# Altium PCB main_pcb_new_id.PcbDoc (part 2 of 2)
Units mil, origin at the board's own origin, x right, y up, seen from the top; angles counter-clockwise.
Board outline 3546.59 x 5237.31 mil, 2 copper layers (Top Layer, Bottom Layer); 111 components, 96 nets, 453 pads, 145 vias.
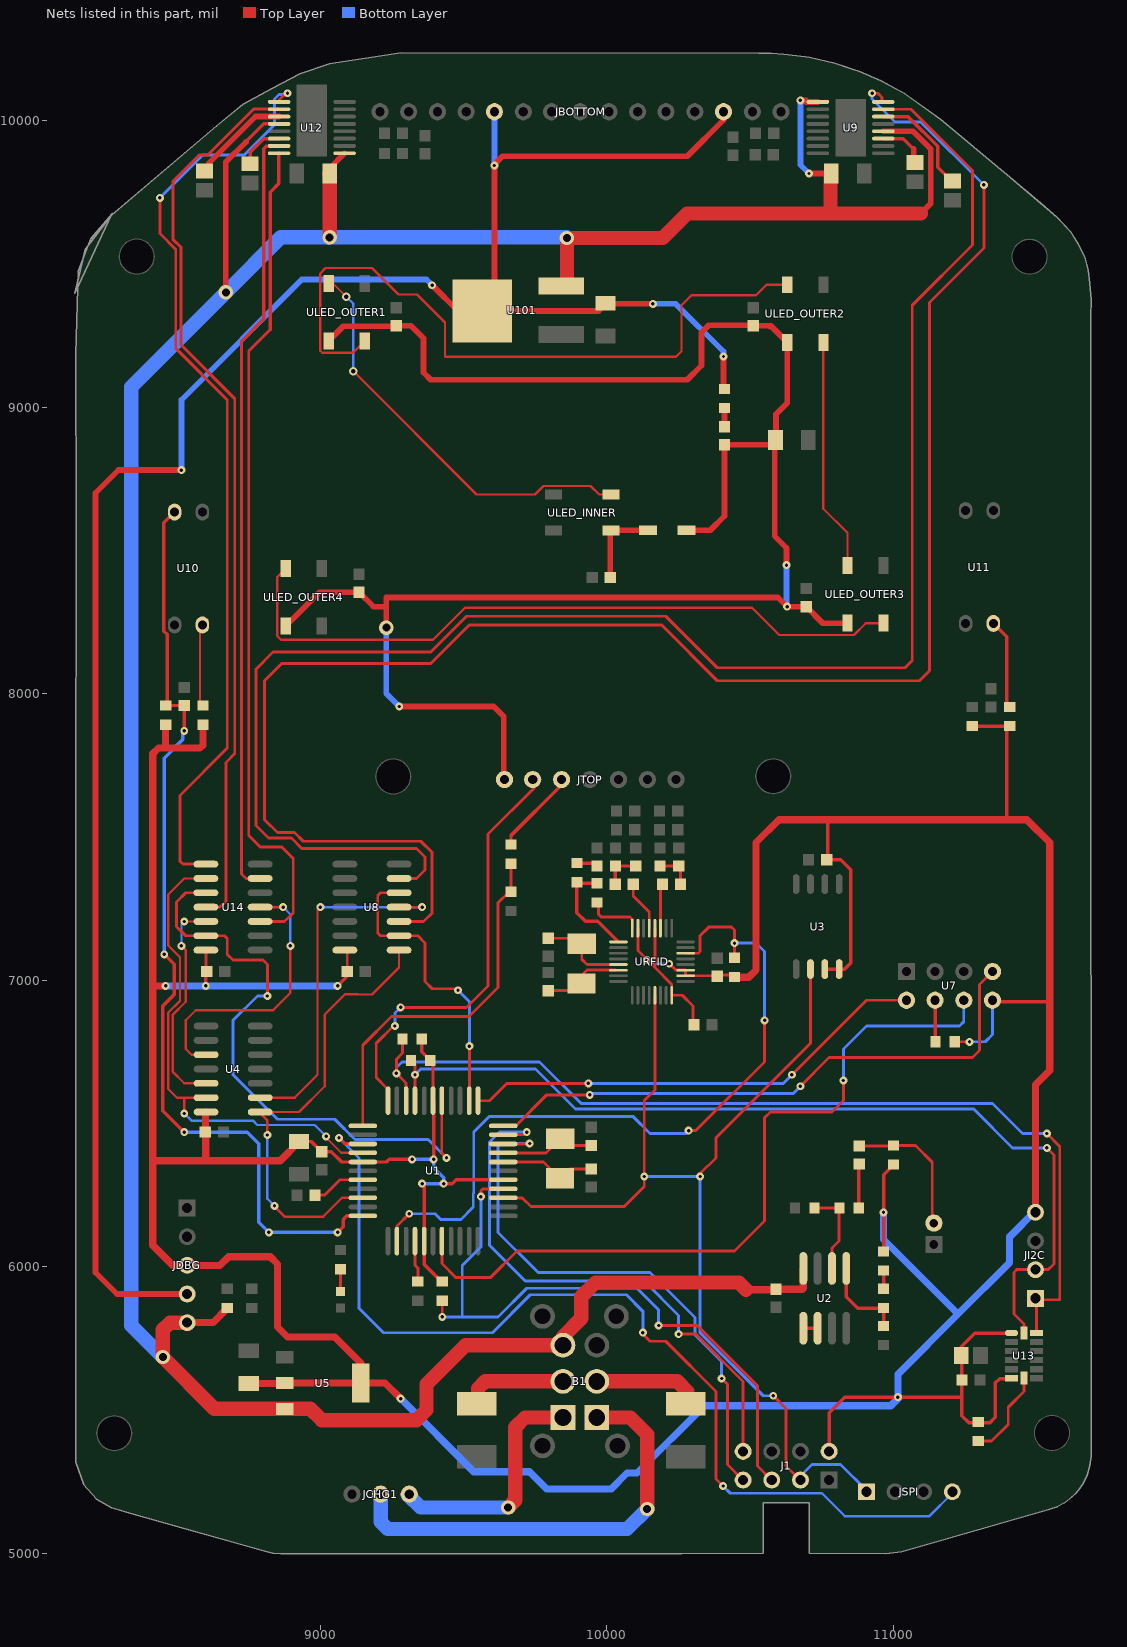
[diagram p2: the nets of this part, all layers, seen from the top]

## Via types
v1: diameter 27.56, hole 11.81, Top Layer to Bottom Layer, 105 vias
v2: diameter 50, hole 28, Top Layer to Bottom Layer, 23 vias
v3: diameter 25.98, hole 12.99, Top Layer to Bottom Layer, tented top, 7 vias
v4: diameter 30, hole 15, Top Layer to Bottom Layer, 4 vias
v5: diameter 20, hole 10, Top Layer to Bottom Layer, 3 vias
v6: diameter 27.6, hole 11.81, Top Layer to Bottom Layer, 2 vias
v7: diameter 25.98, hole 12.99, Top Layer to Bottom Layer, 1 vias

## Nets (pads, with @x,y where several pads share a name; then routed paths per layer and width w, separated by ;. In a path a pad name is that pad's centre, name@x,y a point inside that pad or via, vN(x,y) a via of type N, cw(c..) or ccw(c..) an arc to the next point about the centre after c; other vN are vias at no path point) (continued)
MTR_R_DIR: U1.31 U4.1 U8.1 | length 1603.4
  Top Layer w8: U4.1@8785,6540 8815,6510 v1(8815,6460) ; U4.1@8790,6540 8925,6540 9015,6630 9015,6880 9085.78,6950.78 9130.68,6950.78 9131.46,6950 9180,6950 9274.49,7044.49 U8.1@9274.49,7105 ; v1(8840,6212.5) 8840,6210 8875,6175 9010,6175 9075.55,6240.55 U1.31@9147.95,6240.55
  Bottom Layer w8: v1(8815,6460) 8815,6237.5 v1(8840,6212.5)
MTR_R_EN: U1.13 U8.2 U8.5 | length 1053
  Top Layer w10: U8.5@9274.49,7305 9210,7305 9200,7295 9200,7165 9210,7155 U8.2@9274.49,7155 9340,7155 9365,7130 9365,6995 9390,6970 9475,6970 v1(9480,6965) ; U1.13@9518.95,6579.55 9520,6580.6 v1(9520,6770)
  Bottom Layer w10: v1(9480,6965) 9520,6925 v1(9520,6770)
MTR_R_ENC: C46.2 R20.1 U1.33 U10.3 | length 3299.6
  Top Layer w12: v1(8455,7090) 8490,7055 8490,6950 8450,6910 8450,6545 v1(8525,6470) ; U10.3@8491.12,8633.47 8453.5,8595.84 8453.5,8218.28 8465,8206.78 8465,7963.46 8470,7958.46 8470.04,7958.5 C46.2@8525,7958.5 v1(8525,7870) ; v6(9060,6120) 9080,6140 9080,6165 9092.55,6177.55 U1.33@9147.95,6177.55
  Bottom Layer w12: v1(8455,7090) 8455,7775 8520,7840 8520,7865 v1(8525,7870) ; v1(8525,6470) 8745,6470 8785,6430 8785,6155 v1(8820,6120) v6(9060,6120)
NetB1_1: B1.1 JCHG1.3 | length 839.4
  Top Layer w50: v2(9655,5160) 9680,5185 9680,5440 9714.26,5474.26 B1.1@9846.2,5474.26
  Bottom Layer w50: JCHG1.3@9305,5205 9350,5160 v2(9655,5160)
NetB1_2: B1.2 F1.2 | length 366.7
  Top Layer w50: F1.2@9550,5515 9550,5575 9575.24,5600.24 B1.2@9846.2,5600.24
NetB1_5: B1.5 F2.2 | length 374.7
  Top Layer w50: B1.5@9960,5600 9960.24,5600.24 B1.5@9964.31,5600.24 10244.76,5600.24 10280,5565 F2.2@10280,5525
NetB1_6: B1.6 JCHG1.2 | length 1524.6
  Top Layer w50: B1.6@9964.31,5474.26 10080.74,5474.26 10140,5415 v2(10140,5155)
  Bottom Layer w50: JCHG1.2@9210,5205 9210,5110 9235,5085 10070,5085 v2(10140,5155)
NetC2_2: C2.2 U1.7 XTAL1.2 | length 344.4
  Top Layer w10: U1.7@9637.95,6365.55 9778.94,6365.55 XTAL1.2@9836.06,6308.43 9869.13,6341.5 C2.2@9945,6341.5
NetC3_1: C3.1 R11.1 | length 155.6
  Top Layer w12: R11.1@10878.46,6205 10878.46,6358.46 C3.1@10880,6360
NetC3_2: C3.2 MK1.1 R10.2 | length 501.9
  Top Layer w10: C3.2@10880,6421.5 10998.5,6421.5 R10.2@11000,6420 ; R10.2@11000,6423.46 11076.54,6423.46 11135,6365 11135,6150 MK1.1@11140,6145
NetC4_2: C4.2 U1.8 XTAL1.1 | length 337.4
  Top Layer w10: U1.8@9637.95,6397.55 9787.39,6397.55 XTAL1.1@9837.05,6447.2 9860.75,6423.5 C4.2@9945,6423.5
NetC7_1: C7.1 U1.29 | length 195.1
  Top Layer w10: C7.1@8975,6250 C7.1@8981.5,6250 9015,6250 9068.55,6303.55 U1.29@9147.95,6303.55
NetC9_1: C9.1 URFID.22 XRFID.2 | length 280.8
  Top Layer w10: C9.1@9795,6963.5 9886.14,6963.5 XRFID.2@9911.06,6988.43 9911.06,7016.06 9930,7035 URFID.22@10030,7035
NetC10_1: C10.1 URFID.21 XRFID.1 | length 301.2
  Top Layer w10: C10.1@9795,7146.5 9885.55,7146.5 9912.05,7120 9912.05,7072.95 9930.31,7054.69 10029.69,7054.69 URFID.21@10030,7055 ; URFID.21@10034.69,7054.69 URFID.21@10035,7055
NetC12_1: C12.1 D1.1 ULED_INNER.1 | length 284.4
  Top Layer w20: C12.1@10011.5,8415 10011.5,8566.26 ULED_INNER.1@10014.17,8568.94 10015.24,8570 D1.1@10143.07,8570
NetC21_1: C21.1 R16.1 | length 74.1
  Top Layer w12: R16.1@9895,7408.46 9955.04,7408.46 C21.1@9965,7398.5
NetC22_1: C22.1 C24.2 L2.2 | length 131.2
  Top Layer w12: C24.2@10185,7398.5 C22.1@10250,7398.5 10256.5,7392.01 L2.2@10256.5,7335
NetC25_2: C25.2 U9.11 | length 170.1
  Top Layer w12: U9.11@10964.17,9936.61 11033.39,9936.61 11070,9900
  Top Layer w20: C25.2@11060,9855 11070,9865 11070,9900
NetC30_2: C30.2 U9.14 | length 386.9
  Top Layer w12: U9.14@10964.17,10013.39 11051.61,10013.39 11055,10010 ; 11053.94,10010 11154,9909.94 11154,9836 C30.2@11210,9780
NetC33_2: C33.2 U12.11 | length 338.5
  Top Layer w20: C33.2@8610,9825 8610,9828.46 8610,9850 8773.39,10013.39 U12.11@8855.83,10013.39
NetC39_2: C39.2 U12.14 | length 161.7
  Top Layer w12: C39.2@8755,9848.46 8755,9860 8755,9890 8801.61,9936.61 U12.14@8855.83,9936.61
NetC42_1: C42.1 C45.1 L3.2 | length 134.1
  Top Layer w12: L3.2@10028.5,7335 10028.5,7397.01 C45.1@10030,7398.5 C42.1@10100,7398.5
NetDLED_2: DLED.2 R27.1 | length 82.5
  Top Layer w10: R27.1@9065,5995 9070,5990 DLED.2@9070,5914.53
NetJTOP_5: JTOP.5 R4.2 | length 302.5
  Top Layer w12: R4.2@9665,7475 9665,7505 9840,7680 JTOP.5@9840,7705
NetL1_1: L1.1 R28.1 | length 65
  Top Layer w20: L1.1@10410,8931.5 R28.1@10410,8996.54
NetL2_1: L2.1 URFID.11 | length 158.7
  Top Layer w10: L2.1@10185,7330 10186.65,7328.35 L2.1@10186.65,7328.15 ; URFID.11@10186.65,7181.65 L2.1@10186.65,7328.15 ; L2.1@10193.5,7335 L2.1@10186.65,7328.15
NetL3_1: L3.1 URFID.13 | length 176.5
  Top Layer w10: L3.1@10091.5,7335 10091.5,7293.5 10147.28,7237.72 URFID.13@10147.28,7181.65
NetR1_1: R1.1 U1.37 | length 148.7
  Top Layer w10: U1.37@9329.95,6089.55 9329.95,6005.05 9340,5995 R1.1@9340,5948.46 R1.1@9340,5945
NetR8_1: R8.1 R11.2 U2.6 | length 326.7
  Top Layer w10: R8.1@10723.46,6205 R11.2@10820,6205 ; U2.6@10785,5994.33 10785,6065 10810,6090 10810,6195 R11.2@10820,6205 ; R11.2@10820,6210 R11.2@10820,6205
NetR12_2: R12.2 R13.1 U2.5 | length 305.9
  Top Layer w12: U2.5@10835,5994.33 10835,5895 10875,5855 10965,5855 R12.2@10965,5795
NetR13_2: R13.2 R14.1 | length 63.1
  Top Layer w12: R13.2@10965,5923.46 R14.1@10965,5986.54
NetR15_1: R15.1 R16.2 URFID.17 | length 364.9
  Top Layer w12: R15.1@9965,7338.46 9898.07,7338.46 R16.2@9895,7341.54 9895,7235 9925,7205 9968.13,7205 10039.7,7133.43 URFID.17@10040,7133.43
NetR15_2: R15.2 URFID.16 | length 197.4
  Top Layer w10: R15.2@9970,7271.54 9970,7230 9980,7220 10080,7220 10088.23,7211.77 URFID.16@10088.23,7181.65
NetR18_2: R18.2 U7.CH_PD | length 145.6
  Top Layer w12: U7.CH_PD@11145,6930 11145,6786.54 R18.2@11146.54,6785
NetR19_1: R19.1 U10.1 | length 293.9
  Top Layer w8: R19.1@8580,7958.46 8580,8231.52 U10.1@8588.25,8239.77 U10.1@8585,8236.52 ; R19.1@8585,7958.46 R19.1@8588.25,7961.71
NetR22_2: R22.2 U13.7 | length 319.1
  Top Layer w10: R22.2@11295,5391.54 11341.54,5391.54 11400,5450 11400,5510 11455,5565 11455,5610 U13.7@11460,5615
NetR23_1: R23.1 U11.1 | length 310.7
  Top Layer w12: U11.1@11348.25,8244.77 11395,8198.01 R23.1@11395,7953.46
NetU2_1: U2.1 U2.2 | length 50
  Top Layer w12: U2.1@10685,5785.67 U2.2@10735,5785.67
NetU4_2: U4.2 U8.4 | length 1257.8
  Top Layer w8: U4.2@8790,6590 8910,6590 8990,6670 8990,7245 v1(9000,7255) ; U8.4@9274.49,7255 v1(9355,7255)
  Bottom Layer w8: v1(9000,7255) v1(9355,7255)
NetU4_10: U4.10 U14.4 | length 974.5
  Top Layer w8: U4.10@8601.02,6740 8550,6740 8530,6760 8530,6860 8565,6895 8835,6895 8895,6955 v1(8895,7120) ; U14.4@8789.49,7255 v1(8870,7255)
  Bottom Layer w8: v1(8870,7255) 8895,7230 v1(8895,7120)
NetU4_12: U4.12 U14.12 | length 755.9
  Top Layer w8: v1(8515,7120) 8530,7105 8530,6925 8485.22,6880.22 8485.22,6679.78 8525,6640 U4.12@8595,6640 ; v1(8525,7205) U14.12@8600.51,7205
  Bottom Layer w8: v1(8515,7120) 8515,7195 v1(8525,7205)
NetU8_3: U8.3 U9.16 | length 6322.9
  Top Layer w8: U8.3@9274.49,7205 U8.3@9279.49,7200
  Top Layer w10: U8.3@9274.49,7205 9360,7205 9390,7235 9390,7445 9350,7485 8940,7485 8910,7515 8850,7515 8805,7560 8805,8045 8865,8105 9385,8105 9520,8240 10190,8240 10385,8045 11090,8045 11125,8080 11125,9365 11315,9555 v1(11315,9775) ; v1(10925,10095) 10945,10095 10960,10080 U9.16@10960,10065
  Bottom Layer w10: v1(10925,10095) 10925,10075 11005,9995 11095,9995 v1(11315,9775)
NetU8_6: U8.6 U9.15 | length 5976.5
  Top Layer w10: U8.6@9274.49,7355 9335,7355 9365,7385 9365,7430 9335,7460 8935,7460 8899,7496 8819,7496 8775,7540 8775,8085 8835,8145 9385,8145 9510,8270 10205,8270 10385,8090 11040,8090 11065,8115 11065,9355 11275,9565 11275,9825 11061.02,10038.98 U9.15@10964.17,10038.98
NetU12_9: U12.9 U14.8 | length 3271.8
  Top Layer w10: v1(8440,9730) 8440,9605 8495,9550 8495,9205 8675,9025 8675,7810 8510,7645 8510,7415 8520,7405 U14.8@8600.51,7405 ; U12.9@8855.83,10064.57 8855.83,10070.83 v1@8880,10095 ; v1@8880,10090 v1(8885,10095)
  Bottom Layer w10: v1(8440,9730) 8590,9880 8735,9880 8840,9985 8840,10075 8855,10090 8880,10090 v1(8885,10095)
NetU12_10: U12.10 U14.11 | length 3166.9
  Top Layer w10: U14.11@8600.51,7255 8650,7255 8670,7275 8670,7760 8701,7791 8701,9029 8513,9217 8513,9557.46 8485,9585.46 8485,9786.97 8578.03,9880 8607.47,9880 8767.47,10040 U12.10@8855,10040
NetU12_15: U12.15 U14.6 | length 2680.2
  Top Layer w10: 8725,9230 8725,7370 8740,7355 U14.6@8789.49,7355
  Top Layer w12: 8725,9230 8802.46,9307.46 8802.46,9901.29 8811.17,9910 U12.15@8845,9910
NetU12_16: U12.16 U14.3 | length 2930.7
  Top Layer w10: U14.3@8789.49,7205 8875,7205 8905,7235 8905,7425 8865,7465 8790,7465 8750,7505 8750,9195 8825,9270
  Top Layer w12: 8825,9270 8825,9750 8855,9780 U12.16@8855,9884.61 ; U12.16@8855,9885 U12.16@8855,9884.61 ; U12.16@8855.83,9885.43 U12.16@8855,9884.61
NetULED_INNER_2: ULED_INNER.2 ULED_OUTER1.4 | length 1452.7
  Top Layer w8: ULED_OUTER1.4@9028.94,9431.61 9043.39,9431.61 v4(9090,9385) ; v4(9115,9125) 9545.08,8694.92 9749.17,8694.92 9778.89,8724.64 9942.87,8724.64 9972.59,8694.92 ULED_INNER.2@10014.17,8694.92
  Bottom Layer w8: v4(9090,9385) 9115,9360 v4(9115,9125)
NetULED_OUTER1_2: ULED_OUTER1.2 ULED_OUTER2.4 | length 2479.8
  Top Layer w8: ULED_OUTER1.2@9154.92,9230.83 9113.39,9189.3 9006.25,9189.3 8999.22,9196.33 8999.22,9466.11 9018.11,9485 9180,9485 9272.5,9392.5 9337.5,9392.5 9435,9295 9435,9175 10240,9175 10260,9195 10260,9355 10295,9390 10520,9390 10556.61,9426.61 ULED_OUTER2.4@10628.94,9426.61
NetULED_OUTER2_2: ULED_OUTER2.2 ULED_OUTER3.4 | length 814
  Top Layer w8: ULED_OUTER2.2@10754.92,9225.83 10754.92,8645.08 10838.94,8561.06 ULED_OUTER3.4@10838.94,8446.61
NetULED_OUTER3_2: ULED_OUTER3.2 ULED_OUTER4.4 | length 2472.1
  Top Layer w8: ULED_OUTER4.4@8878.94,8436.61 8849.22,8406.9 8849.22,8201.33 8862.55,8188 9393,8188 9505,8300 10505,8300 10600.7,8204.3 10861.62,8204.3 10903.15,8245.83 ULED_OUTER3.2@10964.92,8245.83
RESET: J1.5 R9.2 U1.4 | length 2269.3
  Top Layer w10: v1(9425,5825) R9.2@9425,5881.54 ; v1(9560,6245) 9560,6265 9566.55,6271.55 U1.4@9637.95,6271.55 ; v1(10180,5795) 10315,5795 10525,5585 10525,5305 J1.5@10575,5255
  Bottom Layer w10: v1(9425,5825) 9495,5825 ; v1(9560,6245) 9560,6070 9495,6005 9495,5825 ; v1(10180,5795) 10180,5850 10105,5925 9720,5925 9620,5825 9495,5825
RESET_RFID: R17.2 U1.35 URFID.6 | length 2630.1
  Top Layer w10: U1.35@9266.95,6089.55 9266.95,6141.95 v1(9310,6185) ; URFID.6@10274.25,7094.06 10319.06,7094.06 10325,7100 10325,7155 10355,7185 10435,7185 10445,7175 v1(10445,7129.23) R17.2@10445,7083.46 ; v1(10285,6475) 10310,6475 10550,6715 v1(10550,6860)
  Bottom Layer w10: v1(9310,6185) 9400,6185 9420,6165 9490,6165 9533.22,6208.22 9533.22,6256.09 9535,6257.87 9535,6470 9590,6525 10090,6525 10150,6465 10275,6465 v1(10285,6475) ; v1@10445,7130 10520,7130 10550,7100 v1(10550,6860)
RST_WIFI: U1.40 U7.RST | length 2686.1
  Top Layer w10: U1.40@9423.95,6089.55 9423.95,6011.05 9473,5962 9592.46,5962 9685.46,6055 10445,6055 10550,6160 10550,6520 10570,6540 10785,6540 10825,6580 v1(10825,6650) v1@10825,6655
  Bottom Layer w10: v1(10825,6650) 10825,6760 10905,6840 11230,6840 11245,6855 U7.RST@11245,6930
RXD_FTDI: J1.8 U1.10 | length 1960.3
  Top Layer w10: U1.10@9637.95,6460.55 9710.55,6460.55 v1(9720,6470) ; v1(10250,5765) 10310,5765 10475,5600 J1.8@10475,5350
  Bottom Layer w10: v1(9720,6470) 9625,6470 9590,6435 9590,6075 9715,5950 10130,5950 10250,5830 v1(10250,5765)
RXD_WIFI: U1.12 U7.TXD | length 1645.2
  Top Layer w10: U1.12@9549.95,6579.55 9589.55,6579.55 9650,6640 v1(9935,6640) ; v1(10645,6670) 10905,6930 U7.TXD@11045,6930 U7.TXD@11050,6930
  Bottom Layer w10: v1(9935,6640) 10615,6640 v1(10645,6670)
SCK: J1.3 JSPI.1 U1.3 U3.6 URFID.29 | length 3824.1
  Top Layer w10: U1.3@9637.95,6240.55 9704.45,6240.55 9735,6210 10060,6210 10130,6280 v1(10130,6315) 10130,6580 10166.97,6616.97 URFID.29@10166.97,6947.4 ; v1(10325,6315) 10325,6325 10380,6380 10380,6450 10710.04,6780.04 U3.6@10710.04,7038.85 ; v1(10580,5550) 10625,5505 10625,5305 J1.3@10675,5255
  Bottom Layer w10: v1(10130,6315) v1(10325,6315) 10325,5770 10545,5550 v1(10580,5550) ; J1.3@10675.85,5255.85 J1.3@10675,5255.85 10675,5270 10715,5310 10815,5310 10905,5220 JSPI.1@10905,5215
SCL: JI2C.2 R6.1 U1.19 U13.14 | length 3270.5
  Top Layer w10: R6.1@9316.54,6720 9316.54,6718.46 9329.95,6705.05 v1(9329.95,6670) U1.19@9329.95,6579.55 ; U13.14@11455,5765 U13.14@11455,5768.74 11455,5800 11420,5835 11420,5980 11430,5990 JI2C.2@11495,5990 11540,5990 11560,6010 11560,6390 v1(11535,6415)
  Bottom Layer w10: v1(9329.95,6670) 9349.95,6690 9750,6690 9890,6550 11280,6550 11415,6415 v1(11535,6415)
SDA: JI2C.1 R7.1 U1.20 U13.13 | length 3426.5
  Top Layer w10: 9286.54,6775 9286.54,6745.79 9265,6724.25 v1(9265,6675) 9298.95,6641.05 U1.20@9298.95,6579.55 ; U13.13@11498.31,5768.74 11498.31,5881.69 11495,5885 11580,5885 11580,6420 v1(11535,6465)
  Bottom Layer w10: v1@9270,6675 v1(9265,6675) 9265,6695 9285,6715 9765,6715 9910,6570 11345,6570 11450,6465 v1(11535,6465)
SPI_CS: JSPI.4 U1.25 | length 3458.1
  Top Layer w10: v1(9065,6450) 9085,6430 U1.25@9140,6430 ; v1(10125,5770) 10120,5770 10150,5740 10205,5740 10380,5565 10380,5260 v1(10405,5235)
  Bottom Layer w8: 10430,5210 10750,5210 10830,5130 11125,5130 JSPI.4@11205,5210
  Bottom Layer w10: v1(9065,6450) 9135,6380 9135,5855 9220,5770 9600,5770 9732.5,5902.5 10067.5,5902.5 10125,5845 v1(10125,5770) ; v1(10405,5235) 10430,5210 ; JSPI.4@11205,5210 JSPI.4@11205,5215
SPK_DIR: U1.26 U4.13 U14.9 | length 1749
  Top Layer w8: v1(8525,6535) 8525,6590 ; U14.9@8600.51,7355 8525,7355 8469.22,7299.22 8469.22,7120.78 8510,7080 8510,6927.63 8469.22,6886.85 8469.22,6620.78 8500,6590 8525,6590 ; U4.13@8601.02,6590 8525,6590 ; v1(9020,6455) 9020,6450 9072.45,6397.55 U1.26@9147.95,6397.55
  Bottom Layer w8: v1(8525,6535) 8550,6510 8765,6510 8780,6495 8980,6495 v1(9020,6455)
SPK_EN: U1.16 U14.10 U14.13 | length 2132.6
  Top Layer w10: U14.10@8600.51,7305 8530,7305 8498.22,7273.22 8498.22,7186.78 8530,7155 U14.13@8600.51,7155 8665,7155 8675,7145 8675,7090 8695,7070 8800,7070 8815,7055 v1(8815,6945) ; U1.16@9423.95,6579.55 9423.22,6578.82 9423.22,6396.78 v1(9440,6380)
  Bottom Layer w10: v1(8815,6945) 8780,6945 8695,6860 8695,6670 8850,6515 9050,6515 9121,6444 9376,6444 v1(9440,6380)
TXD_FTDI: J1.7 U1.9 | length 1961.5
  Top Layer w10: U1.9@9637.95,6428.55 9728.55,6428.55 v1(9730,6430) ; v1(10400,5610) 10420,5590 10420,5310 J1.7@10475,5255
  Bottom Layer w10: v1@9725,6425 v1(9730,6430) 9630,6430 9620,6420 9620,6120 9760,5980 10150,5980 10307,5823 10307,5762.54 10400,5669.54 v1(10400,5610)
TXD_WIFI: U1.11 U7.RXD | length 2062.7
  Top Layer w10: U1.11@9637.95,6491.55 9681.55,6491.55 9790,6600 v1(9940,6600) ; v1(10675,6630) 10775,6730 11275,6730 11300,6755 11300,6985 11340,7025 U7.RXD@11345,7025
  Bottom Layer w10: v1(9940,6600) 9945,6605 10650,6605 v1(10675,6630)
ULTRA_ECHO: R4.1 R5.1 U1.23 | length 1305.2
  Top Layer w10: U1.23@9147.95,6491.55 9147.95,6772.95 9248.22,6873.22 9518.22,6873.22 9620,6975 9620,7270 R5.1@9660,7310 ; R5.1@9660,7305 R5.1@9680,7305 ; R5.1@9665,7310 R4.1@9665,7406.54
ULTRA_TRIG: JTOP.6 U1.22 | length 1506
  Top Layer w10: U1.22@9235.95,6579.55 9235.95,6619.05 9195,6660 9195,6780 9255,6840 v1(9260,6840) ; v1(9280,6905) 9510,6905 9585,6980 9585,7510 9745,7670 JTOP.6@9745,7700
  Bottom Layer w10: v1@9256.91,6840 v1(9260,6840) 9260,6885 v1(9280,6905)
V3: C5.2 C6.1 C8.1 C17.1 C18.2 C19.2 C29.1 C32.1 C36.1 C37.1 C48.1 J1.2 JDBG.3 JI2C.4 R6.2 R7.2 R9.1 R10.1 R14.2 R17.1 R18.1 R19.2 R20.2 R21.2 R22.1 R23.2 U1.5 U1.17 U1.27 U1.38 U3.7 U3.8 U4.14 U5.2 U7.VCC U8.14 U13.1 U13.6 U14.14 URFID.2 URFID.3 URFID.12 URFID.15 URFID.32 | length 17495.4
  Top Layer w10: R20.2@8465,7886.54 R20.2@8470,7891.54 ; U14.14@8600.51,7105 8600.51,7032.99 C32.1@8603.5,7030 ; U4.14@8601.02,6540 U4.14@8602.01,6539.02 ; U8.14@9085.51,7105 9093.5,7097.01 C48.1@9093.5,7030 ; v1(9355,6290) v1@9361.95,6283.05 ; R6.2@9383.46,6720 R6.2@9392.95,6710.51 ; U1.17@9392.95,6579.55 U1.17@9395,6577.5 ; URFID.15@10107.91,7181.65 10107.91,7103.29 10166.97,7044.24 ; URFID.12@10166.97,7181.65 10166.97,7044.24 ; v1(10217.27,7057.27) 10217.73,7057.27 10240,7035 URFID.3@10274.25,7035 URFID.2@10274.25,7015.31 10384.68,7015.31 C18.2@10385,7015 ; C19.2@10300,6845 10300,6910 10262.6,6947.4 URFID.32@10226.02,6947.4 10226.02,6985.18 10166.97,7044.24 ; C18.2@10385,7018.5 10443.03,7018.5 R17.1@10445,7016.54 ; R18.1@11213.46,6785 v1(11265,6785)
  Top Layer w12: v1(8600,6980) C32.1@8600,7025 ; C5.2@8925,6437.09 8967.91,6437.09 C6.1@9005,6400 ; C6.1@9005,6401.93 9038.07,6401.93 9074.45,6365.55 U1.27@9147.95,6365.55 9230.55,6365.55 9240,6375 v1(9320,6375) ; v1(9060,6980) 9090,7010 C48.1@9090,7030 ; 9353.46,6775 9353.46,6750 R6.2@9383.46,6720 ; v1@9361.95,6283.05 U1.38@9361.95,6089.55 9361.95,6008.05 R9.1@9430,5940 ; U1.17@9392.95,6579.55 R6.2@9392.95,6710.51 ; v1(9395,6375) U1.17@9395,6577.5 ; v1(9430,6290) 9460,6290 9473.55,6303.55 U1.5@9637.95,6303.55 ; U3.7@10760,7035 U3.7@10763.85,7038.85 ; U3.7@10760.04,7038.85 U3.7@10763.85,7038.85 ; J1.2@10770,5355 J1.2@10785,5355 ; 10770,7560 10770,7423.5 C8.1@10766.5,7420 10815,7420 10850,7385 10850,7060 10828.85,7038.85 U3.8@10810.04,7038.85 ; J1.2@10775,5355.85 10775,5490 10830,5545 v1(11015,5545) 11238.5,5545 ; U3.8@10810,7035 10806.15,7038.85 U3.7@10763.85,7038.85 ; R14.2@10965,6055 v1(10965,6190) 10965,6321.54 R10.1@11000,6356.54 ; R21.2@11280,7886.54 11395,7886.54 11395,7560 ; U7.VCC@11350,6925 11545,6925 ; U13.1@11411.69,5768.74 11283.74,5768.74 11236.54,5721.54 C36.1@11236.54,5690 11238.5,5688.03 C37.1@11238.5,5605 11238.5,5545 ; U13.6@11415,5610 11370,5610 11355,5595 11355,5475 11335,5455 11263.5,5455 11238.5,5480 11238.5,5545
  Top Layer w25: 8415,6975 8415,6370 ; v1(8460,6980) 8415,6980 8415,7790 8435,7810 8460,7810 ; R20.2@8460,7890 8460,7810 ; R19.2@8590,7895 R19.2@8590,7891.54 8590,7820 8580,7810 8460,7810 ; C29.1@8598.5,6470 8598.5,6538.5 U4.14@8600,6540 ; C29.1@8600,6475 8600,6370 ; C17.1@8750,5592.91 8867.91,5592.91 U5.2@8870,5595 ; U5.2@8875.13,5594.4 9140.6,5594.4 U5.2@9145,5590 ; C5.2@8925,6435 8860,6370 8600,6370 ; v1(9280,5540) 9225.6,5594.4 U5.2@9140.87,5594.4 9140.87,5664.13 9050,5755 8885,5755 8850,5790 8850,6010 8825,6035 8680,6035 8650,6005 8485,6005 8415,6075 8415,6370 ; R17.1@10440,7010 10495,7010 10520,7035 10520,7480 10600,7560 10770,7560 11395,7560 11465,7560 11545,7480 11545,6925 11545,6685 11495,6635 JI2C.4@11495,6190 ; 8415,6370 8600,6370
  Bottom Layer w10: v1(10140,7070) 10152.73,7057.27 v1(10217.27,7057.27) ; v1(11265,6785) 11320,6785 11345,6810 U7.VCC@11345,6930
  Bottom Layer w12: v1(9320,6375) v1(9395,6375) 9395,6345 9430,6310 v1(9430,6290) v1(9355,6290) ; JI2C.4@11492.5,6192.5 JI2C.4@11495,6190
  Bottom Layer w25: v1(8460,6980) v1(8600,6980) v1(9060,6980) ; v1(9280,5540) 9535,5285 9730,5285 9790,5225 10015,5225 10070,5280 10105,5280 10340,5515 10990,5515 v1@11020,5545 ; v1(10965,6190) 10965,6095 11225,5835 ; v1(11015,5545) 11015,5625 11225,5835 ; JI2C.4@11492.5,6192.5 11405,6105 11405,6015 11225,5835 ; JI2C.4@11495,6190 JI2C.4@11495,6195
V5: C51.2 JBOTTOM.5 JBOTTOM.13 JDBG.4 R28.2 U101.2 | length 7558.3
  Top Layer w20: v1(8515,8780) 8295,8780 8215,8700 8215,5980 8290,5905 JDBG.4@8535,5905 ; v1(9390,9425) 9480,9335 U101.2@9565,9335 U101.2@9575,9335 ; U101.2@9590,9315 9607.17,9332.17 U101.2@9607.17,9335 ; v1@9605,9845 9635,9875 10280,9875 10406.38,10001.38 JBOTTOM.13@10406.38,10030.32 ; v1(9607.17,9842.83) U101.2@9607.17,9335 ; JBOTTOM.5@9607.17,10030.32 JBOTTOM.5@9610,10027.48 ; C51.2@9995,9360 9970,9335 U101.2@9607.17,9335 ; C51.2@9997.09,9360 v1(10160,9360) ; v1(10406.38,9176.38) 10406.38,9067.09 R28.2@10410,9063.46
  Bottom Layer w20: v1(8515,8780) 8515,9025 8935,9445 9370,9445 v1(9390,9425) ; v1(9607.17,9842.83) JBOTTOM.5@9607.17,10030.32 ; v1(10160,9360) 10240,9360 10406.38,9193.62 v1(10406.38,9176.38)
VBATT: B1.3 C1.1 C23.2 C31.2 JDBG.5 R3.2 U2.8 U5.3 U9.1 U9.12 U12.1 U12.12 U101.3 | length 11674.8
  Top Layer w12: 8740,9925 8802.8,9987.8 U12.12@8855.83,9987.8
  Top Layer w20: v2(8670,9400) 8670,9855 8740,9925 ; C31.2@9035,9815 9035,9836.26 U12.1@9084.17,9885.43 ; v1(10675,10070) 10695,10070 U9.1@10700,10065 ; 10695.43,10064.57 U9.1@10735.83,10064.57 ; v1(10705,9815) C23.2@10780,9815 ; U9.12@10964.17,9962.2 11067.8,9962.2 11130,9900 11130,9710 11095,9675
  Top Layer w25: JDBG.5@8540,5805 8625,5805 R3.2@8675,5855 ; 10485,5920 C1.1@10590,5920 ; C1.1@10590,5925 C1.1@10593.5,5921.5 ; C1.1@10595,5920 C1.1@10593.5,5921.5 ; U2.8@10685,5994.33 10685,5925 10681.5,5921.5 C1.1@10593.5,5921.5
  Top Layer w50: JDBG.5@8540,5805 JDBG.5@8535,5805 8475,5805 8450,5780 v2(8450,5685) 8630,5505 8965,5505 9005,5465 9335,5465 9370,5500 9370,5590 9506.22,5726.22 B1.3@9846.2,5726.22 9846.2,5756.2 9910,5820 9910,5895 9960,5945 10460,5945 10485,5920 ; C31.2@9030,9815 9032.09,9812.91 v2(9032.09,9592.09) ; U101.3@9860.35,9421.61 9860.35,9589.65 v2(9860,9590) 10195,9590 10280,9675 10780,9675 ; C23.2@10780,9815 10780,9675 ; 11095,9675 10780,9675
  Bottom Layer w20: v1(10675,10070) 10675,9845 v1(10705,9815)
  Bottom Layer w50: v2(8450,5685) 8340,5795 8340,9070 v2(8670,9400) 8862,9592 v2@9032,9592 ; v2@9030,9590 v2@9032,9592 ; v2(9032.09,9592.09) v2@9032,9592 ; v2@9860,9592 v2@9032,9592
VLEDS: C11.1 C13.1 C14.1 C15.1 C16.1 D1.2 JTOP.7 L1.2 ULED_OUTER1.1 ULED_OUTER2.1 ULED_OUTER3.1 ULED_OUTER4.1 | length 6546.8
  Top Layer w20: ULED_OUTER4.1@8878.94,8235.83 8996.61,8353.5 C16.1@9135,8353.5 9185.04,8303.46 9230,8303.46 ; ULED_OUTER1.1@9028.94,9230.83 9080,9281.89 9258.11,9281.89 C13.1@9260,9280 ; v2(9230,8230) 9230,8303.46 ; C13.1@9265,9283.5 9316.5,9283.5 9360,9240 9360,9120 9385,9095 10280,9095 10330,9145 10330,9260 10355,9285 C14.1@10515,9285 ; v1(9275,7955) 9605,7955 9640,7920 JTOP.7@9640,7700 ; D1.2@10276.93,8570 10360,8570 10410,8620 L1.2@10410,8868.5 10573.5,8868.5 C11.1@10590,8885 ; C14.1@10510,9283.5 10566.5,9283.5 10570,9280 ; 10571.26,9283.5 ULED_OUTER2.1@10628.94,9225.83 10628.94,9013.94 10590,8975 C11.1@10590,8880 ; C11.1@10585,8875 10585,8550 10626.54,8508.46 v1(10626.54,8448.46) ; ULED_OUTER3.1@10838.94,8245.83 10752.68,8245.83 C15.1@10695,8303.5 v1(10628.46,8303.46) v1(10628.46,8303.46) 10596.93,8335 9230,8335 9230,8303.46
  Bottom Layer w20: v2(9230,8230) 9230,8000 v1(9275,7955) ; v1(10626.54,8448.46) 10626.54,8303.46 v1(10628.46,8303.46)
pads on no net: B1.0 B1.4 U3.3 U4.4 U4.6 U4.8 U7.GPIO2 U8.8 U8.11 U9.5 U9.7 U9.8 U12.8 U13.3 U13.9 U13.10 U13.11 U13.12 ULED_OUTER4.2 URFID.7 URFID.8 URFID.9 URFID.19 URFID.20 URFID.25 URFID.26 URFID.27 URFID.28

## Polygon pours and split planes (outlines as drawn)
ANT_GND on Bottom Layer "ANT_GND" (solid, pour order 12): 11640,5770 11575,5835 11300,5835 11265,5835 11055,5625 11055,5315 11055,5305 11085,5275 11090,5270 11405,5270 11615,5270 11650,5305 11650,5760
ANT_GND on Bottom Layer "ANT_GND" (solid, remove dead copper, pour order 10): 10370,7680 10370,7725 10325,7770 10005,7770 10000,7770 9985,7755 9985,7600 9985,7575 9890,7480 9760,7350 9760,7300 9760,7225 9710,7175 9680,7145 9680,6900 9705,6875 9800,6780 9950,6780 10490,6780 10525,6815 10515,6825 10515,7545 10515,7580 10370,7725
ANT_GND on Bottom Layer "ANT_GND" (solid, pour order 2): 11325,6420 11325,6000 11180,5855 10990,5665 10865,5665 10565,5665 10560,5660 10550,5670 10550,6040 10550,6080 10610,6140 10610,6360 10610,6410 10660,6460 10680,6480 11270,6480
ANT_GND on Bottom Layer "ANT_GND" (solid, remove dead copper, pour order 16): 9100,10125 9100,9775 9075,9750 8875,9750 8850,9775 8850,10100 8875,10125 9100,10125
ANT_GND on Bottom Layer "ANT_GND" (solid, remove dead copper, pour order 20): 10700,10125 10700,9775 10725,9750 10925,9750 10950,9775 10950,9932.78 10950,10100 10925,10125

## Keep-outs
Keep-Out Layer:
  lines w0.5: 8145.22,9398.7 cw(c8499.55,9398.7) 8271.79,9670.14 ; 8807.69,5006.05 ccw(c8861.77,5195.33) 8861.77,4998.48 ; 10530.9,10234.7 cw(c10530.9,9250.45) 11163.56,10004.43 ; 10971.98,4998.48 ccw(c10971.98,5195.33) 11026.06,5006.05 ; 11545.76,5154.53 ccw(c11491.68,5343.81) 11688.53,5343.81
  lines w0.51: 8145.22,9398.71 8145.22,5343.81 ccw(c8342.07,5343.81) 8287.99,5154.53 8807.69,5006.05 ; 8271.79,9670.14 8670.18,10004.43 cw(c9302.85,9250.45) 9302.85,10234.7 9916.87,10234.7 10530.9,10234.7 ; 8861.77,4998.48 9852.5,4998.48 ; 8889.26,4998.48 9488.24,4998.48 ; 9830,4998.48 10545.38,4998.48 10545.38,5177.62 ; 10545,5177.5 10705.62,5177.5 ; 10705.5,4998.35 10705.5,5177.5 ; 10705.62,4998.48 10971.98,4998.48 ; 11026.06,5006.05 11545.76,5154.53 ; 11163.57,10004.43 11561.96,9670.14 cw(c11334.2,9398.7) 11688.53,9398.7 11688.53,5343.81
  lines w3.94: 9755,8074 9755,8210 ; 10075,8075 10075,8210
  lines w7.87: 9755,8074 10075,8074 ; 9755,8211.79 10075,8211.79 ; 9500.76,8777.79 10327.53,8777.79 ; 9500.76,8777.79 9500.76,9053.38 ; 9500.76,8777.79 10327.53,8777.79 ; 9500.76,8777.79 9500.76,9053.38 ; 9500.76,8777.79 9500.76,9053.38 ; 9500.76,8777.79 10327.53,8777.79 ; 9500.76,9053.38 10327.53,9053.38 ; 9500.76,9053.38 10327.53,9053.38 ; 9500.76,9053.38 10327.53,9053.38 ; 10327.53,8777.79 10327.53,9053.38 ; 10327.53,8777.79 10327.53,9053.38 ; 10327.53,8777.79 10327.53,9053.38

## Silkscreen, mask and mechanical layers (free items; w line width, h text height)
Top Overlay:
  drawing of 596 lines, arcs and shapes, not listed
  text "ARMR" at 9490,10199.96 h30 r270
  text "SPKB" at 9685,10199.96 h30 r270
  text "SPKA" at 9780,10199.96 h30 r270
  text "ARML" at 10280,10199.96 h30 r270
  text "MLB" at 9170,10190 h30 r270
  text "MLA" at 9285,10169.97 h30 r270
  text "GND" at 9385,10169.97 h30 r270
  text "B0V" at 9885,10169.97 h30 r270
  text "B7V" at 9975,10169.97 h30 r270
  text "B3V" at 10080,10169.97 h30 r270
  text "GND" at 10185,10169.97 h30 r270
  text "MRB" at 10480,10169.97 h30 r270
  text "MRA" at 10580,10169.97 h30 r270
  text "5V" at 9585,10139.98 h30 r270
  text "5V" at 10385,10139.98 h30 r270
  text "ULTRA_ECHO" at 9830,8055 h30 r270
  text "ULTRA_TRIG" at 9730,8050 h30 r270
  text "ULTRA_PWR" at 9615,8035.01 h30 r270
  text "ANT_SIG_B" at 10025,8020.01 h30 r270
  text "ANT_SIG_A" at 10225,8020.01 h30 r270
  text "GND" at 9930,7845.07 h30 r270
  text "GND" at 10130,7845.07 h30 r270
  text "Rodolfo Cossovich" at 10075,6505 h40
  text "Sean Purser-Haskell" at 10075,6418.33 h40
  text "Ivan Tchekashkin" at 10075,6331.67 h40
  text "6 JUL 2016" at 10075,6245 h40
  text "GND" at 8364.99,6220 h30
  text "3V" at 11369.99,6175 h30
  text "DLED" at 8335,6120 h30
  text "GND" at 11340,6075 h30
  text "3V" at 8394.98,6020 h30
  text "SCL" at 11340,5975 h30
  text "5V" at 8394.98,5910 h30
  text "SDA" at 11340,5875 h30
  text "VBAT" at 8335,5820 h30
  text "XSP_header" at 10495,5460 h30
  text "SPI_CS" at 11190,5450 h30 r270
  text "MISO" at 10981.67,5400.02 h30 r270
  text "MOSI" at 11078.33,5395.02 h30 r270
  text "SCK" at 10885,5375.03 h30 r270
  text "B7V" at 9280,5365 h30 r270
  text "GND" at 9095,5354.97 h30 r270
  text "B3V" at 9192.5,5354.97 h30 r270
Bottom Overlay:
  text "MLB" at 9230,9865 h30 r90
  text "MLA" at 9315,9855 h30 r90
  text "GND" at 9415,9855 h30 r90
  text "ARMR" at 9520,9855 h30 r90
  text "5V" at 9615,9855 h30 r90
  text "SPKB" at 9715,9855 h30 r90
  text "SPKA" at 9810,9855 h30 r90
  text "B0V" at 9915,9855 h30 r90
  text "B7V" at 10005,9855 h30 r90
  text "B3V" at 10105,9855 h30 r90
  text "GND" at 10220,9855 h30 r90
  text "ARML" at 10305,9855 h30 r90
  text "5V" at 10410,9855 h30 r90
  text "MRB" at 10515,9855 h30 r90
  text "MRA" at 10625,9855 h30 r90
  text "ULTRA_PWR" at 9675,7585 h30 r90
  text "ULTRA_TRIG" at 9760,7575 h30 r90
  text "ULTRA_ECHO" at 9860,7575 h30 r90
  text "GND" at 9965,7575 h30 r90
  text "ANT_SIG_B" at 10060,7575 h30 r90
  text "GND" at 10160,7575 h30 r90
  text "ANT_SIG_A" at 10255,7575 h30 r90
  text "\"It is the child who makes the man," at 11504.98,6690 h60
  text "and no man exists who was not made by the" at 11455,6562.5 h60
  text "child he once was.\"" at 11455,6415 h60
  text "B7V" at 9330,5500 h30 r90
  text "GND" at 9120,5490 h30 r90
  text "B3V" at 9220,5490 h30 r90
  text "XSP_header" at 10755,5450 h30
Bottom Solder:
  region: 10910,10040 10910,9840 10950,9840 10950,10040
  rectangle: 8850,9780 9100,10075
  rectangle: 8905,10075 9100,10125
  region: 10895,10125 10700,10125 10700,10075 10895,10075
  region: 10915,10075 10700,10075 10700,9840 10915,9840
  region: 10950,9840 10725,9840 10725,9790 10950,9790
Mechanical 1:
  circle w0.5: c8359.9,9530.33 r55.12
  circle w0.5: c11474.66,9530.33 r55.12
  circle w0.5: c9254.16,7710.99 r118.11
  circle w0.5: c8280.6,5419.13 r118.11
  circle w0.5: c11552.45,5419.74 r118.11
  circle w0.5: c10579.42,7711.37 r118.11
  circle w0.5: c11474.26,9524.61 r118.11
  circle w0.5: c8359.49,9524.61 r118.11
  circle w0.5: c10578.89,7713.36 r66.93
  circle w0.5: c11551.92,5421.73 r66.93
  circle w0.5: c8280.76,5421.73 r66.93
  circle w0.5: c9253.79,7713.36 r66.93
  circle w0.5: c8358.96,9526.6 r66.93
  circle w0.5: c11473.72,9526.6 r66.93
  circle w0.5: c9112.09,5244.56 r18.7
  circle w0.5: c9210.52,5244.56 r18.7
  lines w0.5: 8206.36,9530.33 8261.47,9530.33 8359.9,9530.33 ; 8359.9,9376.79 8359.9,9431.91 8359.9,9530.33 ; 8359.9,9683.88 8359.9,9628.76 8359.9,9530.33 ; 8513.44,9530.33 8458.32,9530.33 8359.9,9530.33 ; 8685.78,8952.23 8714.43,8923.11 8820.51,9572.49 8817.8,9573.3 ; 9015.63,5000.47 9015.63,4882.36 9405.4,4882.36 9405.4,5000.47 ; 9851.97,5000.47 9851.97,4846.93 9980.71,4846.93 9980.71,5000.47 ; 10162.6,9669.56 10964.43,9669.56 ; 10162.6,9758.19 9671.96,9758.19 9671.96,9669.56 8870.14,9669.56 ccw(c8870.14,9630.19) 8831.63,9638.37 8643.24,8752.08 8582.86,8752.08 8636.13,9002.68 8579.45,9060.27 ; 10221.66,9748.3 10944.3,9748.3 ; 10221.66,9817.25 9612.9,9817.25 9612.9,9748.3 8890.26,9748.3 ccw(c8890.26,9630.19) 8774.73,9654.74 8761.05,9590.4 8696.28,9609.91 ; 11002.94,9638.37 11191.32,8752.08 11251.7,8752.08 11198.43,9002.68 11255.11,9060.27 ; 11016.77,9573.3 11014.06,9572.49 11120.13,8923.11 11148.78,8952.23 ; 11073.51,9590.4 11138.28,9609.91 ; 11321.12,9530.33 11376.24,9530.33 11474.66,9530.33 ; 11474.66,9376.79 11474.66,9431.91 11474.66,9530.33 ; 11474.66,9683.88 11474.66,9628.76 11474.66,9530.33 ; 11628.21,9530.33 11573.09,9530.33 11474.66,9530.33 ; 8569.93,9069.95 8140.15,9506.66 8316.72,9718.23 8678.2,9609.32 8685.4,9613.19 ; 8569.93,9069.95 8579.45,9060.27 ; 8569.93,9069.95 8685.4,9613.19 ; 8579.45,9060.27 8696.28,9609.91 ; 8677.09,8113.91 8677.09,8099.41 9799.17,8099.41 ; 8677.09,8113.91 8677.09,8174.21 11157.47,8174.21 11157.47,8113.91 ; 8677.09,8113.91 9799.17,8113.91 9799.17,8099.41 ; 8685.4,9613.19 8696.28,9609.91 ; 9799.17,8084.83 9799.17,8041.2 10035.39,8041.2 10035.39,8084.83 ; 9799.17,8084.83 9799.17,8099.41 ; 9799.17,8084.83 10035.39,8084.83 ; 9799.17,8099.41 9858.23,8099.41 9858.23,8113.91 9976.34,8113.91 9976.34,8099.41 10035.39,8099.41 ; 10035.39,8084.83 10035.39,8099.41 ; 10035.39,8099.41 11157.47,8099.41 11157.47,8113.91 ; 10035.39,8099.41 10035.39,8113.91 11157.47,8113.91 ; 11138.28,9609.91 11149.16,9613.19 ; 11138.28,9609.91 11255.11,9060.27 ; 11149.16,9613.19 11513.82,9723.05 11694.41,9506.66 11264.63,9069.95 ; 11149.16,9613.19 11264.63,9069.95 ; 11255.11,9060.27 11264.63,9069.95 ; 8144.69,5345.81 ccw(c8341.54,5345.81) 8287.46,5156.53 8807.15,5008.04 ccw(c8861.23,5197.32) 8861.23,5000.47 10971.45,5000.47 ccw(c10971.45,5197.32) 11025.53,5008.04 11545.22,5156.53 ccw(c11491.14,5345.81) 11687.99,5345.81 11687.99,9400.7 ccw(c11333.66,9400.7) 11561.42,9672.13 11163.03,10006.42 ccw(c10530.37,9252.44) 10530.37,10236.69 9916.34,10236.69 9302.31,10236.69 ccw(c9302.31,9252.44) 8669.65,10006.42 8271.26,9672.13 ccw(c8499.02,9400.7) 8144.69,9400.7 8144.69,5345.81 ; 9099.49,5231.97 9099.49,5257.16 9124.69,5257.16 9124.69,5231.97 9099.49,5231.97 ; 9197.92,5231.97 9223.12,5231.97 9223.12,5257.16 9197.92,5257.16 9197.92,5231.97 ; 9296.34,5231.97 9321.54,5231.97 9321.54,5257.16 9296.34,5257.16 9296.34,5231.97 ; 9505.69,8779.78 10332.46,8779.78 10332.46,9055.37 9505.69,9055.37 9505.69,8779.78 ; 9758.86,8075.99 10073.82,8075.99 10073.82,8213.79 9758.86,8213.79 9758.86,8075.99

## Text inside footprints (layer, text, board x,y; h text height)
J1: Bottom Overlay "2" at 10855,5335.85 h50; Bottom Overlay "1" at 10855,5235.85 h50; Bottom Overlay "7" at 10415,5235.85 h50; Bottom Overlay "8" at 10415,5335.85 h50